# Altium PCB solenoid_driver.PcbDoc
Units mil, origin at the board's own origin, x right, y up, seen from the top; angles counter-clockwise.
Board outline 3937.01 x 3937.01 mil, 2 copper layers (Top Layer, Bottom Layer), stack 62.086 mil thick; 121 components, 72 nets, 390 pads, 147 vias.
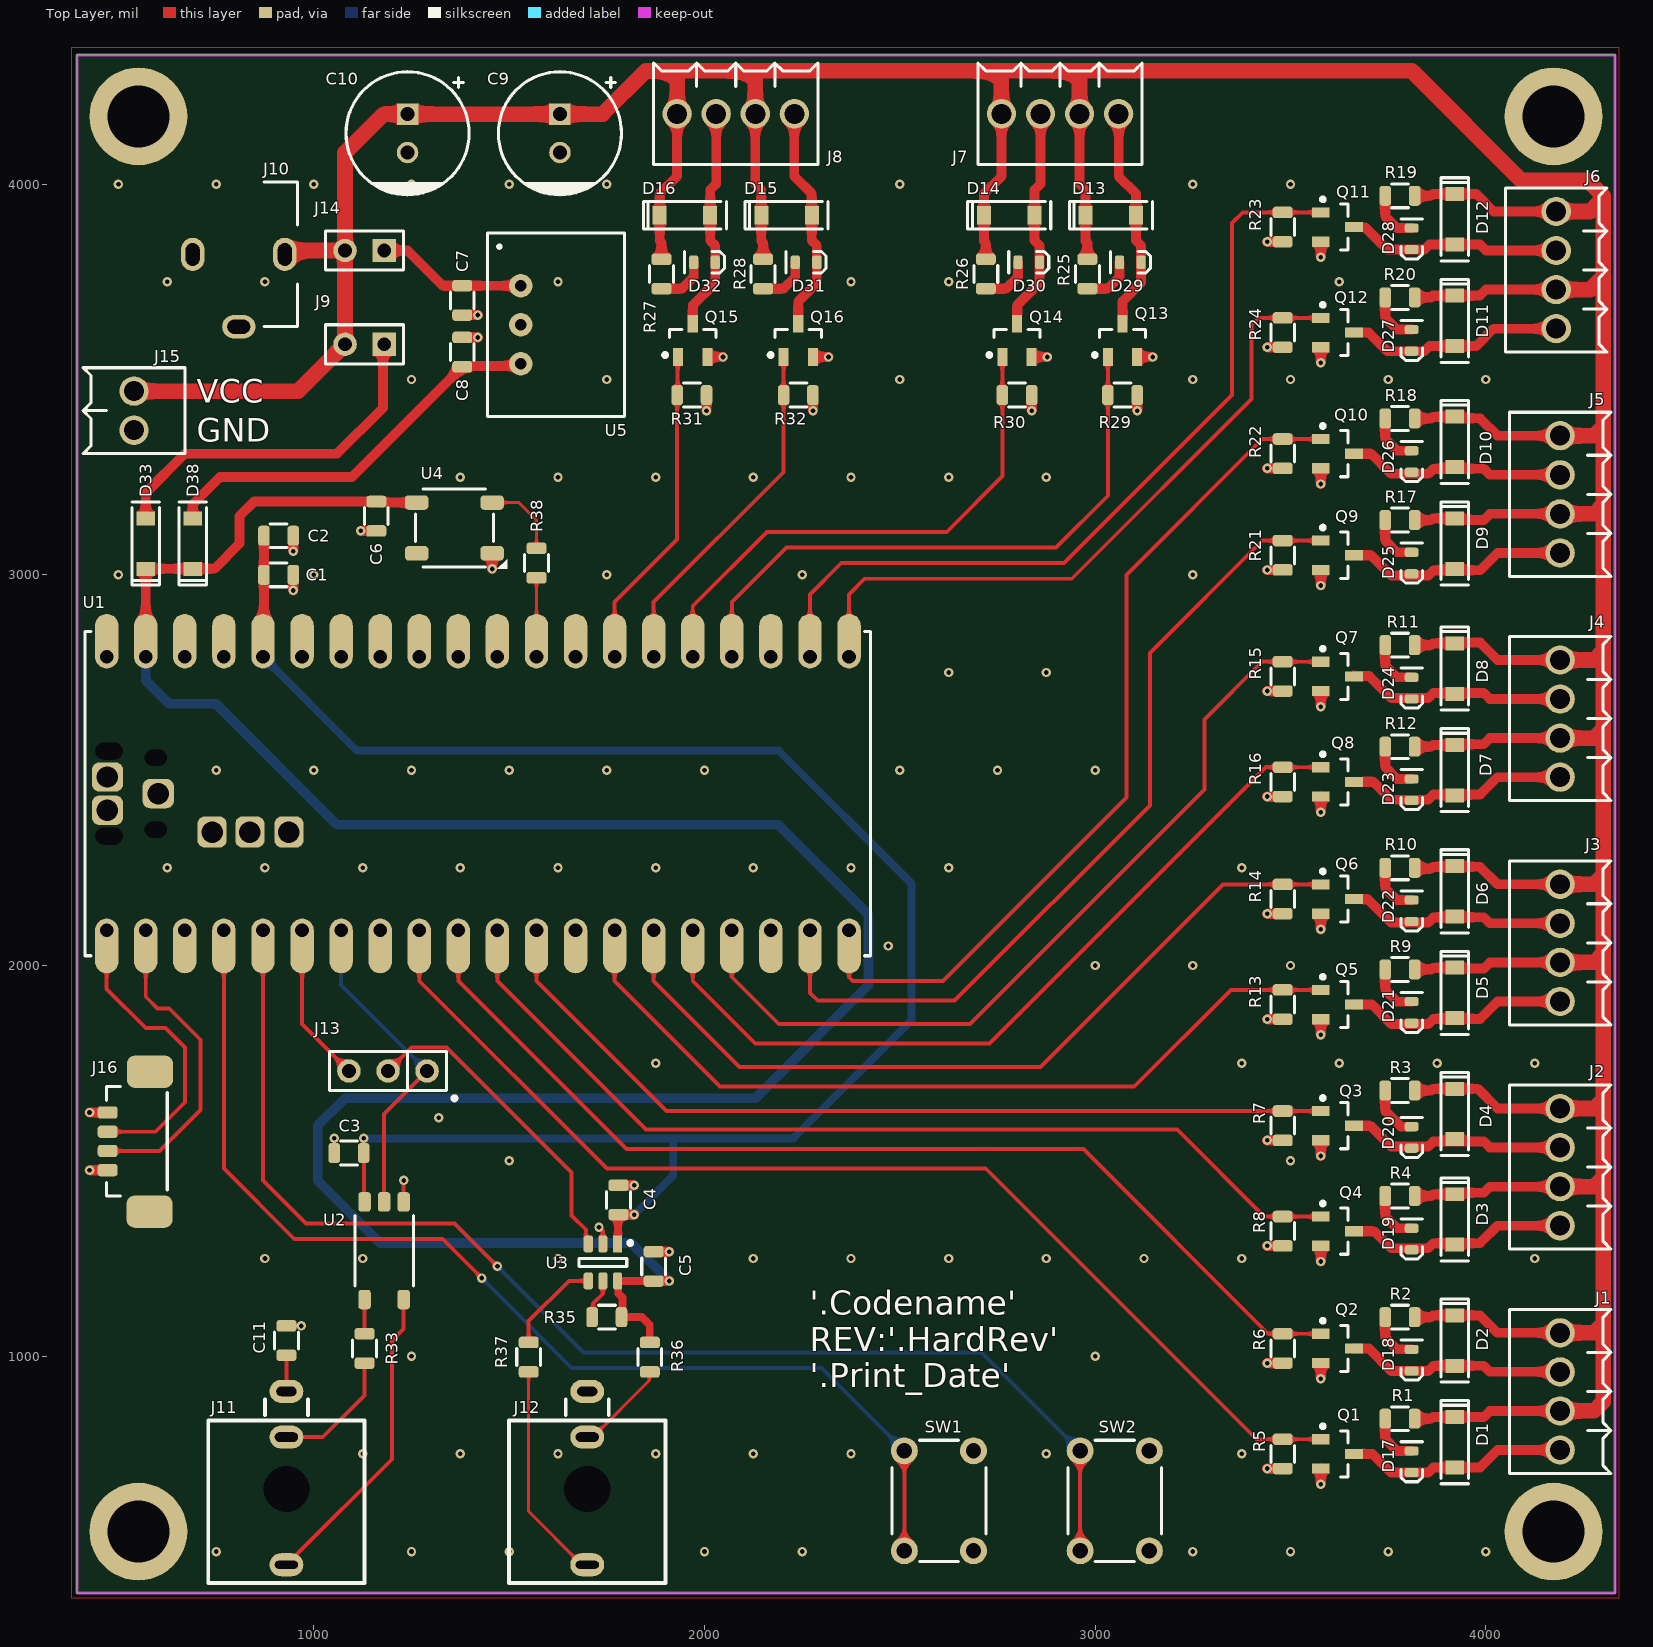
[diagram p0: Top Layer view]
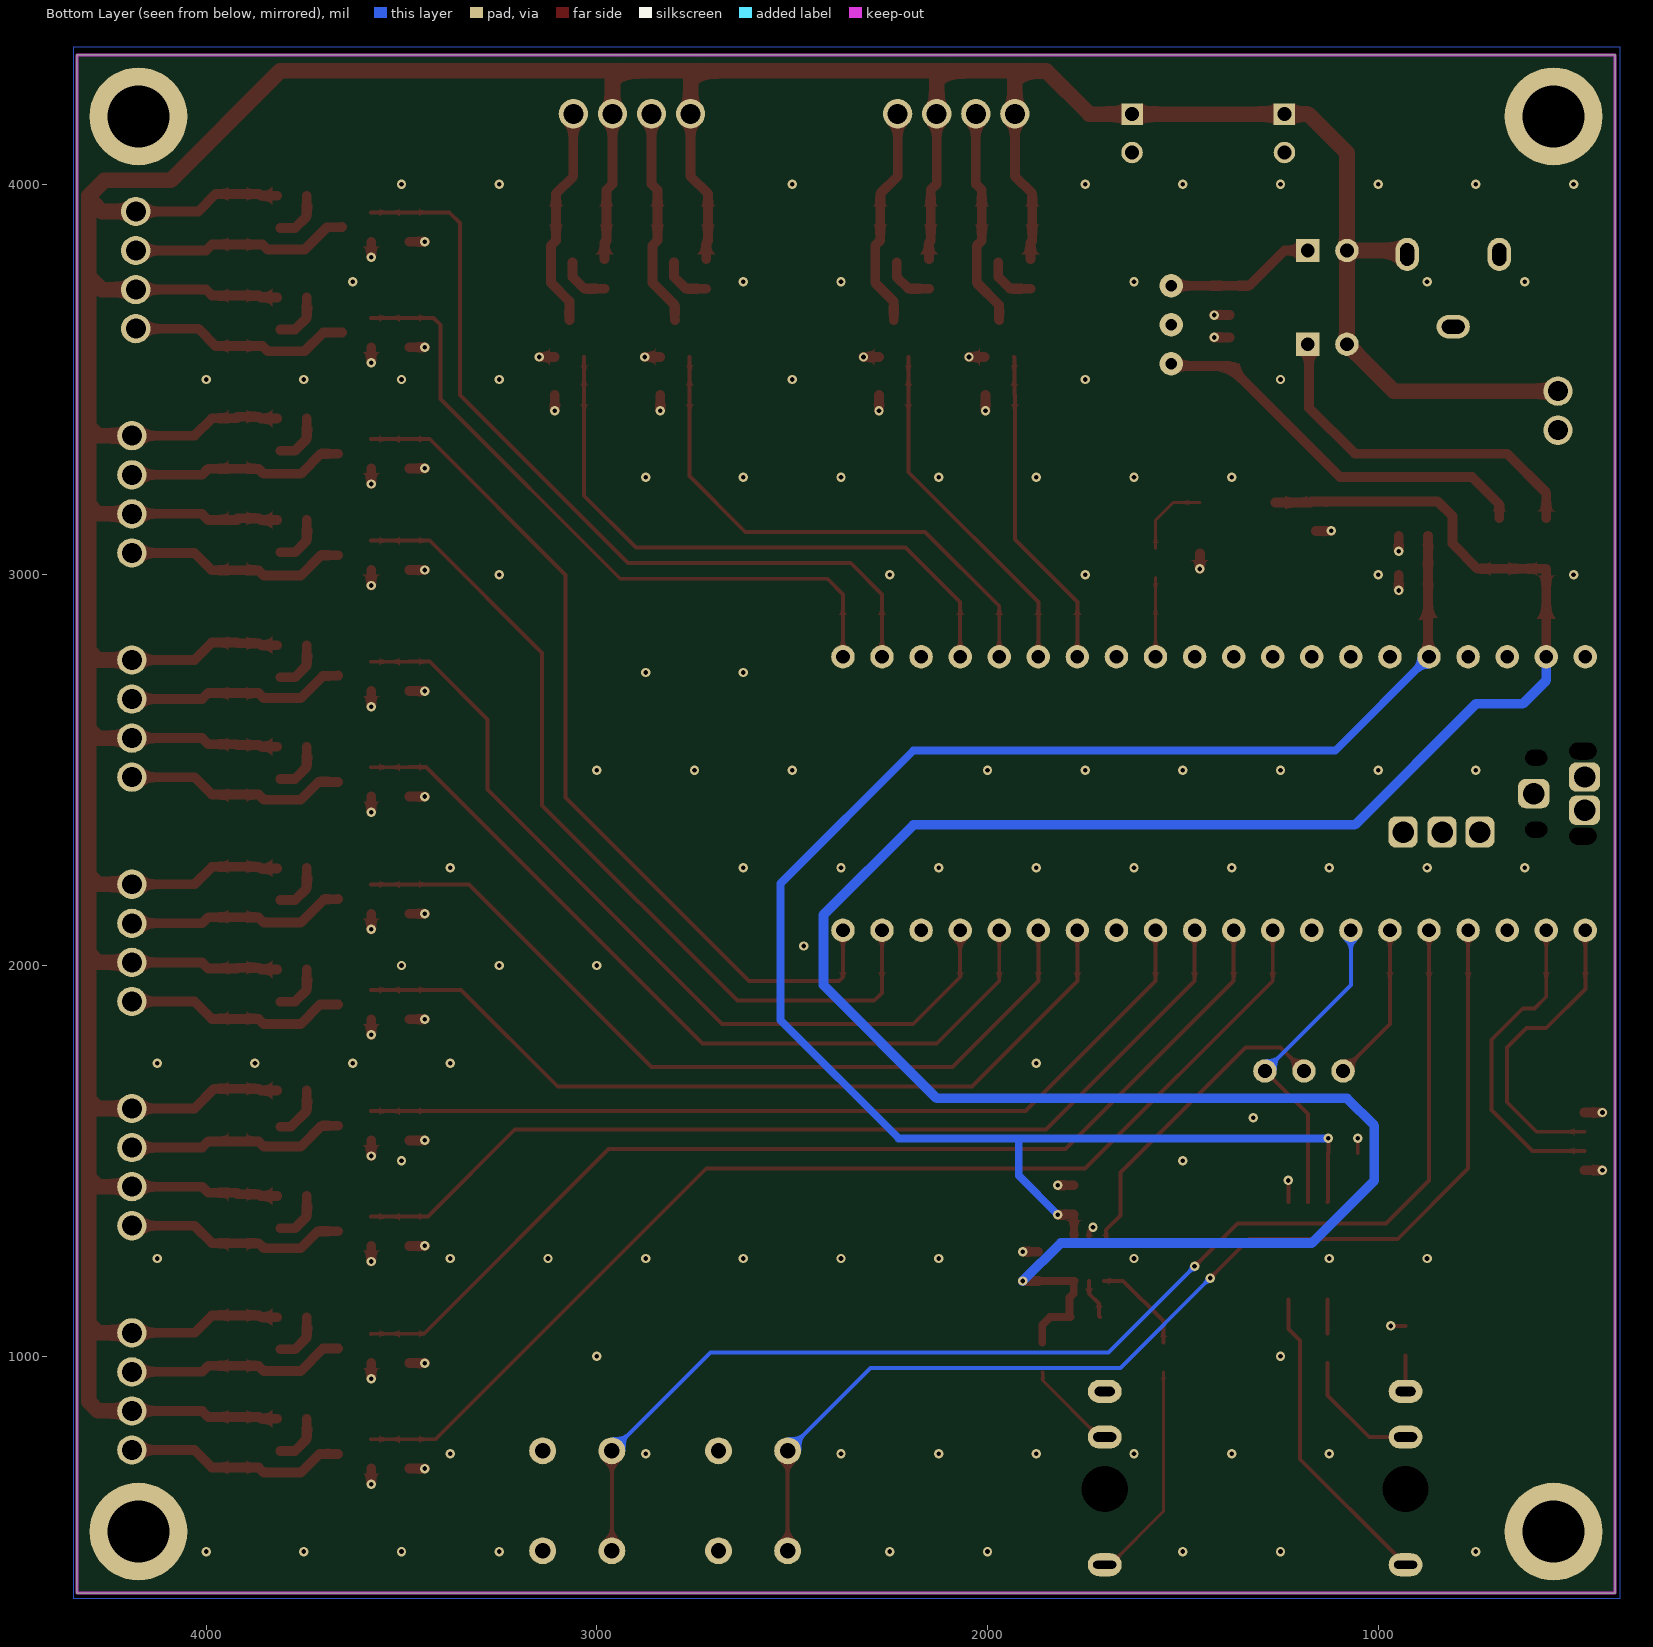
[diagram p1: Bottom Layer view, seen from below]

## Layer stack, top to bottom
Top Solder: solder mask 0.4, Solder Resist, Dk 3.5
Top Layer: signal copper 1.4
Dielectric 1: dielectric 59.2858, FR-4, Dk 4.8
Bottom Layer: signal copper 1.4
Bottom Solder: solder mask 0.4, Solder Resist, Dk 3.5

## Board outline
393.7,393.7 393.7,4330.71 4330.71,4330.71 4330.71,393.7

## Design rules (kind name [scope] priority, off if disabled: settings)
Clearance Clearance_HS [InDifferentialPairClass('DIFF90') vs InPoly] p1: gap=75 ignorepadtopadclearanceinfootprint=FALSE
Clearance Clearance_Poly [All vs InPoly] p2: gap=25 ignorepadtopadclearanceinfootprint=FALSE
Clearance [All] p3: gap=5 ignorepadtopadclearanceinfootprint=FALSE
DiffPairsRouting DIff90 [InDifferentialPairClass('DIFF90')] p1: maxlimit=10 minlimit=7 mostfreqgap=7 toplayer_minwidth=15 toplayer_maxwidth=25 toplayer_prefwidth=25 bottomlayer_minwidth=15 bottomlayer_maxwidth=25 bottomlayer_prefwidth=25 maxuncoupledlength=75
DiffPairsRouting [All] p2: maxlimit=10 minlimit=10 mostfreqgap=10 toplayer_minwidth=15 toplayer_maxwidth=15 toplayer_prefwidth=15 bottomlayer_minwidth=15 bottomlayer_maxwidth=15 bottomlayer_prefwidth=15 maxuncoupledlength=500
Height [All] p1: minheight=0 maxheight=35835.32 prefheight=0
HoleSize [All] p1: absolutevalues=TRUE maxlimit=99999 minlimit=1 maxpercent=80.000 minpercent=20.000
MinimumSolderMaskSliver [All] p1: minsoldermaskwidth=1.8
PolygonConnect [InAnyComponent] p1: thpad.connectstyle=Relief thpad.reliefconductorwidth=10 thpad.reliefentries=4 thpad.polygonreliefangle="90 Angle" thpad.airgapwidth=10 smdpad.connectstyle=Relief smdpad.reliefconductorwidth=10 smdpad.reliefentries=4 smdpad.polygonreliefangle="90 Angle" smdpad.airgapwidth=10 via.connectstyle=Direct via.reliefconductorwidth=10 via.reliefentries=4 via.polygonreliefangle="90 Angle" via.airgapwidth=10
PolygonConnect "Fall through" [All] p2: connectstyle=Direct reliefconductorwidth=10 reliefentries=4 polygonreliefangle="90 Angle" airgapwidth=10
RoutingVias [All] p1: holewidth=28 width=50 viastyle="Through Hole" minholewidth=28 minwidth=50 maxholewidth=28 maxwidth=50
SilkToSilkClearance [All] p1: silktosilkclearance=0
SilkToSolderMaskClearance [IsPad] p1: minsilkscreentomaskgap=0 clearancetoexposedcopper=TRUE
SolderMaskExpansion [All] p1: expansion=2 istentingtop=FALSE
SupplyNets "Schematic Supply Nets_4" [InNet('VSYS')] p1: voltage=0.000
SupplyNets "Schematic Supply Nets_2" [InNet('VIN')] p2: voltage=0.000
SupplyNets "Schematic Supply Nets_1" [InNet('3.3V')] p3: voltage=0.000
SupplyNets "Schematic Supply Nets" [InNet('GND')] p4: voltage=0.000
Width [All] p1: maxlimit=300 minlimit=8 preferedwidth=10
24 further rules are at their usual default settings.

## Components (designator, comment, footprint, x,y, rotation, side; value= is the part's Value field where it differs from the comment)
C1 "0.1µF" Chip0805 910,3000 r180 top
C2 "10µF" Chip0805 910,3100 r180 top
C3 "0.1µF" Chip0805 1090,1520 r0 top
C4 "0.1µF" Chip0805 1780,1400 r270 top
C5 "0.1µF" Chip0805 1870,1230 r270 top
C6 "0.1µF" Chip0805 1160,3150 r90 top
C7 "10µF" Chip0805 1380,3702.4 r90 top
C8 "10µF" Chip0805 1380,3570 r270 top
C9 "68µF" CAP_CAN_TH_3p5mmLS8 1630,4130 r270 top
C10 "68µF" CAP_CAN_TH_3p5mmLS8 1240,4130 r270 top
C11 "0.1µF" Chip0805 930,1040 r270 top
D1 "1N4148W-7-F" SOD-123 3920,780 r270 top
D2 "1N4148W-7-F" SOD-123 3920,1040 r270 top
D3 "1N4148W-7-F" SOD-123 3920,1350 r270 top
D4 "1N4148W-7-F" SOD-123 3920,1620 r270 top
D5 "1N4148W-7-F" SOD-123 3920,1930 r270 top
D6 "1N4148W-7-F" SOD-123 3920,2190 r270 top
D7 "1N4148W-7-F" SOD-123 3920,2500 r270 top
D8 "1N4148W-7-F" SOD-123 3920,2760 r270 top
D9 "1N4148W-7-F" SOD-123 3920,3080 r270 top
D10 "1N4148W-7-F" SOD-123 3920,3340 r270 top
D11 "1N4148W-7-F" SOD-123 3920,3650 r270 top
D12 "1N4148W-7-F" SOD-123 3920,3910 r270 top
D13 "1N4148W-7-F" SOD-123 3040,3920 r0 top
D14 "1N4148W-7-F" SOD-123 2780,3920 r0 top
D15 "1N4148W-7-F" SOD-123 2210,3920 r0 top
D16 "1N4148W-7-F" SOD-123 1950,3920 r0 top
D17 "GREEN" LED0603 3810,730 r270 top
D18 "GREEN" LED0603 3810,990 r270 top
D19 "GREEN" LED0603 3810,1300 r270 top
D20 "GREEN" LED0603 3810,1560 r270 top
D21 "GREEN" LED0603 3810,1880 r270 top
D22 "GREEN" LED0603 3810,2140 r270 top
D23 "GREEN" LED0603 3810,2450 r270 top
D24 "GREEN" LED0603 3810,2710 r270 top
D25 "GREEN" LED0603 3810,3030 r270 top
D26 "GREEN" LED0603 3810,3290 r270 top
D27 "GREEN" LED0603 3810,3600 r270 top
D28 "GREEN" LED0603 3810,3860 r270 top
D29 "GREEN" LED0603 3090,3800 r0 top
D30 "GREEN" LED0603 2830,3800 r0 top
D31 "GREEN" LED0603 2260,3800 r0 top
D32 "GREEN" LED0603 2000,3800 r0 top
D33 "1N4148W-7-F" SOD-123 570,3080 r90 top
D38 "1N4148W-7-F" SOD-123 690,3080 r90 top
J1 "691210910004" WURTH_691210910004 4190,910 r90 top
J2 "691210910004" WURTH_691210910004 4190,1484 r90 top
J3 "691210910004" WURTH_691210910004 4190,2058 r90 top
J4 "691210910004" WURTH_691210910004 4190,2632 r90 top
J5 "691210910004" WURTH_691210910004 4190,3206 r90 top
J6 "691210910004" WURTH_691210910004 4180,3780 r90 top
J7 "691210910004" WURTH_691210910004 2910,4180 r180 top
J8 "691210910004" WURTH_691210910004 2080,4180 r180 top
J9 "3-644456-2" TE_3-644456-2 1130,3590 r180 top
J10 "PJ-102B" CUI_PJ-102B 808,3820 r90 top
J11 "WQP-WQP419GR" PJ366ST 930,660 r180 top
J12 "WQP-WQP419GR" PJ366ST 1700,660 r180 top
J13 "3-644456-3" TE_3-644456-3 1190,1730 r180 top
J14 "3-644456-2" TE_3-644456-2 1130,3830 r180 top
J15 "691210910002" WURTH_691210910002 540,3420 r270 top
J16 "0533980471" Molex_0533980471 540,1550 r270 top
Q1 "AOSS32338C" SOT23-3N 3620,750 r0 top
Q2 "AOSS32338C" SOT23-3N 3620,1020 r0 top
Q3 "AOSS32338C" SOT23-3N 3620,1590 r0 top
Q4 "AOSS32338C" SOT23-3N 3620,1320 r0 top
Q5 "AOSS32338C" SOT23-3N 3620,1900 r0 top
Q6 "AOSS32338C" SOT23-3N 3620,2170 r0 top
Q7 "AOSS32338C" SOT23-3N 3620,2740 r0 top
Q8 "AOSS32338C" SOT23-3N 3620,2470 r0 top
Q9 "AOSS32338C" SOT23-3N 3620,3050 r0 top
Q10 "AOSS32338C" SOT23-3N 3620,3310 r0 top
Q11 "AOSS32338C" SOT23-3N 3620,3890 r0 top
Q12 "AOSS32338C" SOT23-3N 3620,3620 r0 top
Q13 "AOSS32338C" SOT23-3N 3070,3600 r90 top
Q14 "AOSS32338C" SOT23-3N 2800,3600 r90 top
Q15 "AOSS32338C" SOT23-3N 1970,3600 r90 top
Q16 "AOSS32338C" SOT23-3N 2240,3600 r90 top
R1 "10k" Chip0805 3780,840 r180 top
R2 "10k" Chip0805 3780,1100 r180 top
R3 "10k" Chip0805 3780,1680 r180 top
R4 "10k" Chip0805 3780,1410 r180 top
R5 "10k" Chip0805 3480,750 r270 top
R6 "10k" Chip0805 3480,1020 r270 top
R7 "10k" Chip0805 3480,1590 r270 top
R8 "10k" Chip0805 3480,1320 r270 top
R9 "10k" Chip0805 3780,1990 r180 top
R10 "10k" Chip0805 3780,2250 r180 top
R11 "10k" Chip0805 3780,2820 r180 top
R12 "10k" Chip0805 3780,2560 r180 top
R13 "10k" Chip0805 3480,1900 r270 top
R14 "10k" Chip0805 3480,2170 r270 top
R15 "10k" Chip0805 3480,2740 r270 top
R16 "10k" Chip0805 3480,2470 r270 top
R17 "10k" Chip0805 3780,3140 r180 top
R18 "10k" Chip0805 3780,3400 r180 top
R19 "10k" Chip0805 3780,3970 r180 top
R20 "10k" Chip0805 3780,3710 r180 top
R21 "10k" Chip0805 3480,3050 r270 top
R22 "10k" Chip0805 3480,3310 r270 top
R23 "10k" Chip0805 3480,3890 r270 top
R24 "10k" Chip0805 3480,3620 r270 top
R25 "10k" Chip0805 2980,3770 r270 top
R26 "10k" Chip0805 2720,3770 r270 top
R27 "10k" Chip0805 1890,3770 r270 top
R28 "10k" Chip0805 2150,3770 r270 top
R29 "10k" Chip0805 3070,3460 r0 top
R30 "10k" Chip0805 2800,3460 r0 top
R31 "10k" Chip0805 1967.6,3460 r0 top
R32 "10k" Chip0805 2240,3460 r0 top
R33 "220" Chip0805 1130,1020 r90 top
R35 "2.2k" Chip0805 1750,1100 r0 top
R36 "220" Chip0805 1860,997.6 r90 top
R37 "220" Chip0805 1550,997.6 r270 top
R38 "330" Chip0805 1570,3030 r90 top
SW1 "TL1105YF160Q" E-Switch_TL1105YF 2600,630 r270 top
SW2 "TL1105YF160Q" E-Switch_TL1105YF 3050,630 r270 top
U1 "Raspberry Pi Pico" RASPBERRY_PI_PICO 1420,2440 r90 top
U2 "TLP2398(V4-TPL,E" 6-SO_NO_PIN_2 1180,1270 r90 top
U3 "TXU0101DBVR" SOT-23-6N 1740,1240 r270 top
U4 "WS2812B-V5/W" WS2812B 1360,3120 r0 top
U5 "R-78E5.0-0.5" 3-SIP_Module 1530,3640 r270 top

## Footprints (in the part's own frame and the unit in brackets; to place one, negate y for a bottom-side part, rotate by r counter-clockwise, add the part's x,y. Pads: shape width x height; smd on the part's side, far side on the other; paste and mask are expansions set on the pad)
3-SIP_Module [mil]
  round 60 hole 30: 1(-100,0) 2(0,0) 3(100,0)
  silkscreen extent -235,-85 235,265, body extent -228,-78 228,257, height 410
6-SO_NO_PIN_2 [mil]
  rrect50% 50x32 smd: 1(-125,50) 3(-125,-50) 4(125,-50) 5(125,0) 6(125,50)
  silkscreen extent -90,-75 90,75, body extent -138,-73 138,73, height 87
CAP_CAN_TH_3p5mmLS8 [mil]
  rect 55x55 hole 35: 1(-49.21,0)
  round 55 hole 35: 2(49.21,0)
  silkscreen extent -157,-157 157,157
Chip0805 [mm] "Chip Resistor, 2-Leads, Body 2.05x1.25mm, IPC Medium Density"
  rrect50% 0.75x1.3 smd: 1(-0.955,0) 2(0.955,0)
  silkscreen extent -0.55,-0.77 0.55,0.77, body extent -0.95,-0.55 0.95,0.55, height 0.5
CUI_PJ-102B [mil]
  oval 85x60 hole 36 slot 58 at 0 deg: 1(0,-118) 2(0,118)
  oval 60x85 hole 36 slot 58 at 90 deg: 3(-185,0)
  silkscreen extent -185,-150 185,-65, body extent -195,-145 175,422, height 452
E-Switch_TL1105YF [mm]
  round 1.75 hole 1: 1(-3.25,-2.25) 2(3.25,-2.25) 3(-3.25,2.25) 4(3.25,2.25)
  silkscreen extent -3.94,-3.05 3.94,3.05, body extent -3.94,-3 3.94,3, height 16.32
LED0603 [mm] "Chip LED, 2-Leads, Body 1.57x0.85mm, IPC Medium Density"
  rrect50% 0.6x0.9 smd: 1(-0.7,0) 2(0.7,0)
  silkscreen extent -1.3,-0.7 1.3,0.7, body extent -0.82,-0.37 0.83,0.36, height 0.68
Molex_0533980471 [mm]
  rrect50% 2.1x3 smd: 0(-4.525,1.035) 0(4.572,1.016)
  rrect50% 0.8x1.3 smd: 1(-1.875,-1.715) 2(-0.625,-1.714) 3(0.625,-1.714) 4(1.875,-1.714)
  silkscreen extent -3.56,-1.78 3.56,2.16, body extent -5.07,-2.1 5.07,2.1, height 4.71
PJ366ST [mm] "Moddeled after QingPu WQP-WQP419GR"
  round 0.025 hole 3 unplated: 0(0,0)
  oval 2.2x1.5 hole 0.6 slot 1.3 at 0 deg: 1(0,-6.35)
  oval 2.2x1.5 hole 0.6 slot 1.5 at 0 deg: 2(0,-3.38)
  oval 2.2x1.5 hole 0.5 slot 1.5 at 0 deg: 3(0,4.92)
  silkscreen extent -5.08,-5.84 5.08,6.1, body extent -5,-6.73 5,6, height 15.52
RASPBERRY_PI_PICO [mil]
  round 5 hole 43.31 slot 70.87 at 90 deg unplated: 0(-108.9,943.82) 0(108.9,943.82)
  round 5 hole 41.34 slot 57.09 at 90 deg unplated: 0(-92.09,824.53) 0(92.09,824.53)
  oval 140x60 smd: 1(-390,950) 2(-390,850) 3(-390,750) 4(-390,650) 5(-390,550) 6(-390,450) 7(-390,350) 8(-390,250) 9(-390,150) 10(-390,50) 11(-390,-50) 12(-390,-150) 13(-390,-250) 14(-390,-350) 15(-390,-450) 16(-390,-550) 17(-390,-650) 18(-390,-750) 19(-390,-850) 20(-390,-950) 21(390,-950) 22(390,-850) 23(390,-750) 24(390,-650) 25(390,-550) 26(390,-450) 27(390,-350) 28(390,-250) 29(390,-150) 30(390,-50) 31(390,50) 32(390,150) 33(390,250) 34(390,350) 35(390,450) 36(390,550) 37(390,650) 38(390,750) 39(390,850) 40(390,950)
  round 60 hole 35: 1(-350,950) 2(-350,850) 3(-350,750) 4(-350,650) 5(-350,550) 6(-350,450) 7(-350,350) 8(-350,250) 9(-350,150) 10(-350,50) 11(-350,-50) 12(-350,-150) 13(-350,-250) 14(-350,-350) 15(-350,-450) 16(-350,-550) 17(-350,-650) 18(-350,-750) 19(-350,-850) 20(-350,-950) 21(350,-950) 22(350,-850) 23(350,-750) 24(350,-650) 25(350,-550) 26(350,-450) 27(350,-350) 28(350,-250) 29(350,-150) 30(350,-50) 31(350,50) 32(350,150) 33(350,250) 34(350,350) 35(350,450) 36(350,550) 37(350,650) 38(350,750) 39(350,850) 40(350,950)
  rrect50% 75x80 hole 55: TP1(0,818.11) TP2(42.5,948.03) TP3(-42.5,948.03)
  rrect50% 80x75 hole 55: TP4(-98.43,680.32) TP5(-98.43,583.46) TP6(-98.43,483.46)
  silkscreen extent -415,-1005 415,1005, body extent -413,-1005 413,1054, height 147
SOD-123 [mm] "SOD123"
  rect 0.91x1.22 smd: 1(-1.64,0) 2(1.64,0)
  silkscreen extent -2.7,-0.9 2.7,0.9, body extent -1.92,-0.85 1.93,0.85, height 1.43
SOT23-3N [mil] "SOT23, 3-Leads, Body 2.9x1.3mm, Pitch 0.95mm, Lead Span 2.5mm, IPC Medium Density"
  rect 45x26 smd: 1(-42.5,37.4) 2(-42.5,-37.4) 3(42.5,0)
  silkscreen extent -42,-59 28,76, body extent -28,-59 28,59, height 43
SOT-23-6N [mm] "SOT23, 6-Leads, Body 2.90x2.70mm, Pitch 0.95mm, IPC Medium Density"
  rect 1.1x0.6 smd: 1(-1.2,0.95)
  rrect50% 1.1x0.6 smd: 2(-1.2,0) 3(-1.2,-0.95) 4(1.2,-0.95) 5(1.2,0) 6(1.2,0.95)
  silkscreen extent -1.39,-1.55 0.25,1.9, body extent -0.95,-1.55 0.95,1.55, height 1.45
TE_3-644456-2 [mil]
  rect 60x60 hole 35: 1(-50,0)
  round 60 hole 35: 2(50,0)
  silkscreen extent -100,-50 100,50, body extent -94,-46 94,46, height 395
TE_3-644456-3 [mil]
  round 60 hole 35: 1(-100,0) 2(0,0) 3(100,0)
  silkscreen extent -175,-50 150,75, body extent -144,-46 144,46, height 395
WS2812B [mil]
  rrect50% 60x37 smd: 1(-96.46,64.96) 2(-96.46,-64.96) 3(96.46,-64.96) 4(96.46,64.96)
  silkscreen extent -100,-105 135,100, body extent -106,-98 106,98, height 62
WURTH_691210910002 [mm]
  round 1.905 hole 1.3: 1(-1.27,0) 2(1.27,0)
  silkscreen extent -2.79,-3.3 2.79,3.3, body extent -2.74,-3.25 2.74,3.25, height 8.55
WURTH_691210910004 [mm]
  round 1.905 hole 1.3: 1(-3.81,0) 2(-1.27,0) 3(1.27,0) 4(3.81,0)
  silkscreen extent -5.33,-3.3 5.33,3.3, body extent -5.28,-3.25 5.28,3.25, height 8.55

## Part data
C1 C3 C4 C5 C6 C11: library part C2012X7T2E104K125AA, "CAP CER 0.1UF 250V 10% X7T 0805", Manufacturer="TDK Corporation", Operating Temperature="-55°C ~ 125°C", Package / Case="0805 (2012 Metric)", Ratings=-, Supplier Part Number 1=445-7749-1-ND, Temperature Coefficient=X7T, Tolerance=±10%, Voltage=250V, Applications="General Purpose", Capacitance=0.1µF, Features=-, Height - Seated (Max)=-, helpURL=http://product.tdk.com/capacitor/mlcc/en/documents/mlcc_commercial_midvoltage_en.pdf, Lead Spacing=-, Lead Style=-, Manufacturer Part Number=C2012X7T2E104K125AA, Mounting Type="Surface Mount, MLCC", PartNumber=C2012X7T2E104K125AA, Series=C, Size / Dimension="0.079\" L x 0.049\" W (2.00mm x 1.25mm)", Supplier 1=Digi-Key, Supplier 2=Mouser, Thickness (Max)="0.057\" (1.45mm)"
C2 C7 C8: library part C2012X5R1C106K125AC, "CAP CER 10UF 16V 10% X5R 0805", Manufacturer="TDK Corporation", Operating Temperature="-55°C ~ 85°C", Package / Case="0805 (2012 Metric)", Ratings=-, Supplier Part Number 1=445-7646-1-ND, Temperature Coefficient=X5R, Tolerance=±10%, Voltage=16V, Applications="General Purpose", Capacitance=10µF, Features=-, Height - Seated (Max)=-, helpURL=http://product.tdk.com/capacitor/mlcc/en/documents/mlcc_commercial_general_en.pdf, Lead Spacing=-, Lead Style=-, Manufacturer Part Number=C2012X5R1C106K125AC, Mounting Type="Surface Mount, MLCC", PartNumber=C2012X5R1C106K125AC, Series=C, Size / Dimension="0.079\" L x 0.049\" W (2.00mm x 1.25mm)", Supplier 1=Digi-Key, Supplier 2=Mouser, Thickness (Max)="0.057\" (1.45mm)"
C9 C10: library part UPW1J680MPD, "CAP ALUM 68UF 20% 63V RADIAL", ESR (Equivalent Series Resistance)=-, Lifetime @ Temp#="3000 Hrs @ 105°C", Manufacturer=Nichicon, Operating Temperature="-55°C ~ 105°C", Package / Case="Radial, Can", Ripple Current=263.2mA, Supplier Part Number 1=493-1935-ND, Tolerance=±20%, Voltage Rating=63V, Applications="General Purpose", Capacitance=68µF, Height - Seated (Max)="0.453\" (11.50mm)", helpURL=http://nichicon-us.com/english/products/pdfs/e-pw.pdf, Impedance="342 mOhm", Lead Spacing="0.138\" (3.50mm)", Manufacturer Part Number=UPW1J680MPD, Mounting Type="Through Hole", PartNumber=UPW1J680MPD, Series=PW, Size / Dimension="0.315\" Dia (8.00mm)", Supplier 1=Digi-Key, Supplier 2=Mouser, Surface Mount Land Size=-, Type=Polar, Unit Price (USD)=0.48
D1 D2 D3 D4 D5 D6 D7 D8 D9 D10 D11 D12 D13 D14 D15 D16 D33 D38: "DIODE SWITCH 100V 0.15A SOD123", Capacitance @ Vr, F="2pF @ 0V, 1MHz", Current - Average Rectified (Io)=150mA, Current - Reverse Leakage @ Vr="1µA @ 75V", Manufacturer="Diodes Incorporated", Operating Temperature - Junction="-65°C ~ 150°C", Package / Case=SOD-123, Supplier Part Number 1=1N4148W-FDICT-ND, Voltage - DC Reverse (Vr) (Max)=100V, Voltage - Forward (Vf) (Max) @ If="1.25V @ 150mA", Datasheets=http://www.diodes.com/datasheets/ds30086.pdf, Diode Type=Standard, Manufacturer Part Number=1N4148W-7-F, Mounting Type="Surface Mount", PartNumber=1N4148W-7-F, Reverse Recovery Time (trr)=4ns, Series=0, Speed="Small Signal =< 200mA (Io), Any Speed", Supplier 1=Digi-Key, Supplier Device Package=SOD-123
D17 D18 D19 D20 D21 D22 D23 D24 D25 D26 D27 D28 D29 D30 D31 D32: library part LTST-C191GKT, "LED GREEN CLEAR THIN 0603 SMD", Color=Green, Manufacturer="Lite-On Inc", Supplier Part Number 1=160-1443-1-ND, Datasheets=http://optoelectronics.liteon.com/upload/download/DS22-2000-300/S_110_LTST-C191TGKT.pdf, Manufacturer Part Number=LTST-C191GKT, PartNumber=LTST-C191GKT, Supplier 1=Digi-Key, Supplier 2=Mouser, Supplier Part Number 2=859-LTST-C191GKT
J1 J2 J3 J4 J5 J6 J7 J8: "TERM BLOCK 4P HORIZON 2.54MM PCB", Manufacturer="Würth Elektronik", Supplier Part Number 1=732-691210910004-ND, helpURL=https://www.we-online.com/catalog/datasheet/691210910004.pdf, Manufacturer Part Number=691210910004, PartNumber=691210910004, Supplier 1=Digi-Key, Supplier 2=Mouser, Supplier 3=LCSC, Supplier Part Number 2=710-691210910004
J9 J14: "CONN HEADER VERT 2POS .100 TIN", Manufacturer="TE Connectivity", Supplier Part Number 1=A31112-ND, helpURL=http://www.te.com/commerce/DocumentDelivery/DDEController?Action=srchrtrv&DocNm=644456&DocType=Customer+Drawing&DocLang=English, Manufacturer Part Number=3-644456-2, PartNumber=3-644456-2, Supplier 1=Digi-Key, Supplier 2=Mouser, Supplier Part Number 2=571-3-644456-2
J10: "CONN PWR JACK 2.5X5.5MM SOLDER", Manufacturer="CUI Devices", Supplier Part Number 1=CP-102B-ND, helpURL=https://www.cuidevices.com/product/resource/pj-102b.pdf, Manufacturer Part Number=PJ-102B, PartNumber=PJ-102B, Supplier 1=Digi-Key, Supplier 2=Mouser, Supplier Part Number 2=490-PJ-102B
J11 J12: "CONN 3.5mm VIRTICAL STEREO", Manufacturer=QingPu, Connector Type="Phone Jack", Gender=Female, helpURL=http://www.qingpu-electronics.com/en/products/WQP-PJ366ST-364.html, Manufacturer Part Number=WQP-WQP419GR, PartNumber=WQP-WQP419GR, Signal Lines=Stereo, Supplier 1=QingPu, Supplier Part Number 1=WQP-WQP419GR
J13: "CONN HEADER VERT 3POS .100 TIN", Manufacturer="TE Connectivity", Supplier Part Number 1=A31113-ND, helpURL=http://www.te.com/commerce/DocumentDelivery/DDEController?Action=srchrtrv&DocNm=644456&DocType=Customer+Drawing&DocLang=English, Manufacturer Part Number=3-644456-3, PartNumber=3-644456-3, Supplier 1=Digi-Key, Supplier 2=Mouser, Supplier Part Number 2=571-3-644456-3
J15: "TERM BLOCK 2P HORIZON 2.54MM PCB", Manufacturer="Würth Elektronik", Supplier Part Number 1=732-691210910002-ND, helpURL=https://www.we-online.com/catalog/datasheet/691210910002.pdf, Manufacturer Part Number=691210910002, PartNumber=691210910002, Supplier 1=Digi-Key, Supplier 2=Mouser, Supplier 3=LCSC, Supplier Part Number 2=710-691210910002
J16: "CONN HEADER SMD 4POS 1.25MM", Manufacturer=Molex, Supplier Part Number 1=WM7608CT-ND, helpURL=https://www.molex.com/pdm_docs/sd/533980471_sd.pdf, Manufacturer Part Number=0533980471, PartNumber=0533980471, Supplier 1=Digi-Key, Supplier 2=Mouser, Supplier 21=LCSC, Supplier Part Number 2=538-53398-0471, Supplier Part Number 3=C234195
Q1 Q2 Q3 Q4 Q5 Q6 Q7 Q8 Q9 Q10 Q11 Q12 Q13 Q14 Q15 Q16: "MOSFET N-CH 30V 4A SOT23-3", Manufacturer="Alpha & Omega Semiconductor Inc.", Supplier Part Number 1=785-AOSS32338CTR-ND, helpURL=https://aosmd.com/res/data_sheets/AOSS32338C.pdf, Manufacturer Part Number=AOSS32338C, PartNumber=AOSS32338C, Supplier 1=Digi-Key, Supplier 2=Mouser, Supplier 3=LCSC, Supplier Part Number 3=C5587797
R1 R2 R3 R4 R5 R6 R7 R8 R9 R10 R11 R12 R13 R14 R15 R16 R17 R18 R19 R20 R21 R22 R23 R24 R25 R26 R27 R28 R29 R30 R31 R32: library part CRCW080510K0FKEA, "RES 10.0K OHM 1/8W 1% 0805 SMD", Manufacturer="Vishay Dale", Package / Case="0805 (2012 Metric)", Power (Watts)="0.125W, 1/8W", Supplier Part Number 1=541-10.0KCCT-ND, Temperature Coefficient=±100ppm/°C, Tolerance=±1%, Composition="Thick Film", Features="Automotive AEC-Q200 Qualified", Height="0.020\" (0.50mm)", helpURL=http://www.vishay.com/doc?20035, Manufacturer Part Number=CRCW080510K0FKEA, Number of Terminations=2, PartNumber=CRCW080510K0FKEA, Resistance=10k, Series=CRCW, Size / Dimension="0.079\" L x 0.049\" W (2.00mm x 1.25mm)", Supplier 1=Digi-Key, Supplier 2=Mouser, Supplier Device Package="0805 (2012 Metric)"
R33 R36 R37: library part CRCW0805220RFKEA, "RES 220 OHM 1/8W 1% 0805 SMD", Manufacturer="Vishay Dale", Package / Case="0805 (2012 Metric)", Power (Watts)="0.125W, 1/8W", Supplier Part Number 1=541-220CCT-ND, Temperature Coefficient=±100ppm/°C, Tolerance=±1%, Composition="Thick Film", Features="Automotive AEC-Q200 Qualified", Height="0.020\" (0.50mm)", helpURL=http://www.vishay.com/doc?20035, Manufacturer Part Number=CRCW0805220RFKEA, Number of Terminations=2, PartNumber=CRCW0805220RFKEA, Resistance=220, Series=CRCW, Size / Dimension="0.079\" L x 0.049\" W (2.00mm x 1.25mm)", Supplier 1=Digi-Key, Supplier 2=Mouser, Supplier Device Package="0805 (2012 Metric)"
R35: library part CRCW08052K20FKEA, "RES 2.20K OHM 1/8W 1% 0805 SMD", Manufacturer="Vishay Dale", Package / Case="0805 (2012 Metric)", Power (Watts)="0.125W, 1/8W", Supplier Part Number 1=541-2.20KCCT-ND, Temperature Coefficient=±100ppm/°C, Tolerance=±1%, Composition="Thick Film", Features="Automotive AEC-Q200 Qualified", Height="0.020\" (0.50mm)", helpURL=http://www.vishay.com/doc?20035, Manufacturer Part Number=CRCW08052K20FKEA, Number of Terminations=2, PartNumber=CRCW08052K20FKEA, Resistance=2.2k, Series=CRCW, Size / Dimension="0.079\" L x 0.049\" W (2.00mm x 1.25mm)", Supplier 1=Digi-Key, Supplier 2=Mouser, Supplier Device Package="0805 (2012 Metric)"
R38: library part CRCW0805330RFKEA, "RES 330 OHM 1/8W 1% 0805 SMD", Manufacturer="Vishay Dale", Package / Case="0805 (2012 Metric)", Power (Watts)="0.125W, 1/8W", Supplier Part Number 1=541-330CCT-ND, Temperature Coefficient=±100ppm/°C, Tolerance=±1%, Composition="Thick Film", Features="Automotive AEC-Q200 Qualified", Height="0.020\" (0.50mm)", helpURL=http://www.vishay.com/doc?20035, Manufacturer Part Number=CRCW0805330RFKEA, Number of Terminations=2, PartNumber=CRCW0805330RFKEA, Resistance=330, Series=CRCW, Size / Dimension="0.079\" L x 0.049\" W (2.00mm x 1.25mm)", Supplier 1=Digi-Key, Supplier 2=Mouser, Supplier Device Package="0805 (2012 Metric)"
SW1 SW2: "SWITCH TACTILE SPST-NO 0.05A 12V", Manufacturer=E-Switch, Supplier Part Number 1=EG5455-ND, helpURL=https://configured-product-images.s3.amazonaws.com/Datasheets/TL1105.pdf, Manufacturer Part Number=TL1105YF160Q, PartNumber=TL1105YF160Q, Supplier 1=Digi-Key, Supplier 2=Mouser, Supplier 3=LCSC, Supplier Part Number 2=612-TL1105YF160Q, Supplier Part Number 3=C4364602
U1: "RASPBERRY PI PICO RP2040 BOARD", Manufacturer="Raspberry Pi", Manufacturer Part Number=SC0915, Supplier Part Number 1=2648-SC0915CT-ND, PartNumber="Raspberry Pi Pico", Supplier 1=Digi-Key
U2: "High Speed Optocouplers SO6", Manufacturer=Toshiba, helpURL=https://www.mouser.com/datasheet/3/105/1/D2FD834D79FD2648344FBF9B2F5DDBECCF121398C9309D34F7BB98A9BB2CC1D2.pdf, Manufacturer Part Number=TLP2398(V4-TPL,E, PartNumber=TLP2398(V4-TPL,E, Supplier 1=Digi-Key, Supplier 2=Mouser, Supplier 3=LCSC, Supplier Part Number 2=757-TLP2398V4-TPLE, Supplier Part Number 3=C6285465
U3: "IC XLTR VL UNIDIR SOT-23-6", Manufacturer="Texas Instruments", Supplier Part Number 1=296-TXU0101DBVRCT-ND, helpURL=https://www.ti.com/lit/ds/symlink/txu0101.pdf, Manufacturer Part Number=TXU0101DBVR, PartNumber=TXU0101DBVR, Supplier 1=Digi-Key, Supplier 2=Mouser, Supplier 3=LCSC, Supplier Part Number 2=595-TXU0101DBVR, Supplier Part Number 3=C7136368
U4: "Addressable RGB LED", Manufacturer=Worldsemi, Supplier Part Number 1=1568-COM-16347CT-ND, Datasheets=https://www.peace-corp.co.jp/data/WS2812B-V5_V1.0_EN.pdf, Manufacturer Part Number=WS2812B-V5/W, PartNumber=WS2812B-V5/W, Supplier 1=Digi-Key, Supplier 2=Mouser, Supplier 3=LCSC, Supplier Part Number 2=474-COM-24837, Supplier Part Number 3=C2874885
U5: "DC DC CONVERTER 5V 3W", Manufacturer="Recom Power", Supplier Part Number 1=945-1648-5-ND, helpURL=https://recom-power.com/pdf/Innoline/R-78E-0.5.pdf, Manufacturer Part Number=R-78E5.0-0.5, PartNumber=R-78E5.0-0.5, Supplier 1=Digi-Key, Supplier 2=Mouser, Supplier 3=LCSC, Supplier Part Number 2=919-R-78E5.0-0.5, Supplier Part Number 21=C5199916

## Free pads (board coordinates)
  round 250 hole 158: ""(551.18,551.18) ""(551.18,4173.23) ""(4173.23,551.18) ""(4173.23,4173.23)

## Via types
v1: diameter 24, hole 12, Top Layer to Bottom Layer, tented both sides, 147 vias

## Nets (pads, with @x,y where several pads share a name; then routed paths per layer and width w, separated by ;. In a path a pad name is that pad's centre, name@x,y a point inside that pad or via, vN(x,y) a via of type N, cw(c..) or ccw(c..) an arc to the next point about the centre after c; other vN are vias at no path point)
3.3V: C1.2 C2.2 C3.2 C4.2 U1.36 U2.6 U3.1 | length 4605.3
  Top Layer w10: v1(1127.6,1557.6) C3.2 1128.8,1518.8 1128.8,1396.2 U2.6
  Top Layer w20: U3.1 1778.7,1288.54 1778.7,1361.1 C4.2
  Top Layer w25: U1.36@870,2790 872.4,2792.4 C1.2 C2.2 ; C4.2 v1(1820,1362.4)
  Bottom Layer w20: U1.36@870,2790 1110,2550 2190,2550 2530,2210 2530,1860 2227.6,1557.6 1920,1557.6 ; v1(1127.6,1557.6) 1920,1557.6 ; v1(1820,1362.4) 1920,1462.4 1920,1557.6
GND: C1.1 C2.1 C3.1 C4.1 C5.1 C6.1 C7.1 C8.1 C9.2 C10.2 C11.1 J10.2 J10.3 J12.1 J15.2 J16.1 J16.4 pad. Q1.2 Q2.2 Q3.2 Q4.2 Q5.2 Q6.2 Q7.2 Q8.2 Q9.2 Q10.2 Q11.2 Q12.2 Q13.2 Q14.2 Q15.2 Q16.2 R5.2 R6.2 R7.2 R8.2 R13.2 R14.2 R15.2 R16.2 R21.2 R22.2 R23.2 R24.2 R29.2 R30.2 R31.2 R32.2 SW1.3 SW1.4 SW2.3 SW2.4 U1.3 U1.8 U1.13 U1.18 U1.23 U1.28 U1.33 U1.38 U2.4 U3.2 U4.3 U5.2 | length 1871.3
  Top Layer w10: C11.1 v1(967.6,1077.6) ; C3.1 v1(1052.4,1557.6) ; U2.4 v1(1230,1450) ; v1(1730,1330) 1740,1320 U3.2
  Top Layer w25: v1(426.18,1476.18) J16.4 ; v1(426.18,1623.82) J16.1 ; v1(947.6,2960) C1.1 ; v1(947.6,3060) C2.1 ; v1(1120,3112.4) C6.1 ; C8.1 v1(1420,3607.6) ; C7.1 v1(1420,3664.8) ; v1(1456.46,3015.04) U4.3 ; C4.1 v1(1820,1437.6) ; C5.1 v1(1910,1267.6) ; v1(2005.2,3420) R31.2 ; Q15.2 v1(2047.5,3557.5) ; Q16.2 v1(2317.5,3557.5) ; v1(2277.6,3420) R32.2 ; Q14.2 v1(2877.5,3557.5) ; v1(2837.6,3420) R30.2 ; Q13.2 v1(3147.5,3557.5) ; v1(3107.6,3420) R29.2 ; v1(3440,712.4) R5.2 ; v1(3440,982.4) R6.2 ; v1(3440,1282.4) R8.2 ; v1(3440,1552.4) R7.2 ; v1(3440,1862.4) R13.2 ; v1(3440,2132.4) R14.2 ; v1(3440,2432.4) R16.2 ; v1(3440,2702.4) R15.2 ; v1(3440,3012.4) R21.2 ; v1(3440,3272.4) R22.2 ; v1(3440,3582.4) R24.2 ; v1(3440,3852.4) R23.2 ; v1(3577.5,672.5) Q1.2 ; v1(3577.5,942.5) Q2.2 ; v1(3577.5,1242.5) Q4.2 ; v1(3577.5,1512.5) Q3.2 ; v1(3577.5,1822.5) Q5.2 ; v1(3577.5,2092.5) Q6.2 ; v1(3577.5,2392.5) Q8.2 ; v1(3577.5,2662.5) Q7.2 ; v1(3577.5,2972.5) Q9.2 ; v1(3577.5,3232.5) Q10.2 ; v1(3577.5,3542.5) Q12.2 ; v1(3577.5,3812.5) Q11.2
  other v1: 750,500 1250,500 1500,500 2000,500 2250,500 3250,500 3500,500 3750,500 4000,500 1125,750 1375,750 1625,750 1875,750 2125,750 2375,750 2875,750 3375,750 1250,1000 3000,1000 875,1250 1125,1250 1625,1250 2125,1250 2375,1250 2625,1250 2875,1250 3125,1250 3375,1250 4125,1250 1500,1500 3500,1500 1320,1610 1875,1750 3375,1750 3625,1750 3875,1750 4125,1750 3000,2000 3250,2000 3500,2000 2470,2050 625,2250 875,2250 1125,2250 1375,2250 1625,2250 1875,2250 2125,2250 2375,2250 2625,2250 3375,2250 750,2500 1000,2500 1250,2500 1500,2500 1750,2500 2000,2500 2500,2500 2750,2500 3000,2500 2625,2750 2875,2750 500,3000 1000,3000 1750,3000 2250,3000 3250,3000 1375,3250 1625,3250 1875,3250 2125,3250 2375,3250 2625,3250 2875,3250 1250,3500 1750,3500 2500,3500 3250,3500 3500,3500 3750,3500 4000,3500 625,3750 875,3750 1625,3750 2375,3750 2625,3750 3625,3750 500,4000 750,4000 1000,4000 1250,4000 1500,4000 1750,4000 2500,4000 3250,4000 3500,4000
LED_DATA: R38.2 U4.4 | length 204.6
  Top Layer w8: U4.4 1525.04,3184.96 1570,3140 R38.2
MIDI_RX: J13.1 U1.7 U2.5 | length 831.7
  Top Layer w10: U2.5 1180,1620 J13.1
  Bottom Layer w10: U1.7@1070,2090 1070,1950 J13.1
MIDI_TX: J13.3 U1.6 | length 409.7
  Top Layer w10: U1.6@970,2090 970,2050 970,1850 J13.3
NetC7_2: C7.2 J14.1 U5.1 | length 387.3
  Top Layer w25: J14.1 1240,3830 1330,3740 U5.1
NetC8_2: C8.2 D38.2 U5.3 | length 1030.9
  Top Layer w25: D38.2 690,3180 760,3250 1097.6,3250 1366.91,3519.31 1366.91,3530.14 1369.17,3532.4 C8.2 1382.26,3534.67 1524.67,3534.67 U5.3
NetC11_2: C11.2 J11.1 | length 92.4
  Top Layer w10: J11.1 C11.2
NetD17_1: D17.1 R1.2 | length 132.4
  Top Layer w25: R1.2 3742.4,787.6 3772.44,757.56 D17.1
NetD18_1: D18.1 R2.2 | length 132.4
  Top Layer w25: R2.2 3742.4,1047.6 3772.44,1017.56 D18.1
NetD19_1: D19.1 R4.2 | length 132.4
  Top Layer w25: R4.2 3742.4,1357.6 3772.44,1327.56 D19.1
NetD20_1: D20.1 R3.2 | length 136.6
  Top Layer w25: R3.2 3742.4,1627.6 3782.44,1587.56 D20.1
NetD21_1: D21.1 R9.2 | length 132.4
  Top Layer w25: R9.2 3742.4,1937.6 3772.44,1907.56 D21.1
NetD22_1: D22.1 R10.2 | length 132.4
  Top Layer w25: R10.2 3742.4,2197.6 3772.44,2167.56 D22.1
NetD23_1: D23.1 R12.2 | length 132.4
  Top Layer w25: R12.2 3742.4,2507.6 3772.44,2477.56 D23.1
NetD24_1: D24.1 R11.2 | length 132.4
  Top Layer w25: R11.2 3742.4,2767.6 3772.44,2737.56 D24.1
NetD25_1: D25.1 R17.2 | length 132.4
  Top Layer w25: R17.2 3742.4,3087.6 3772.44,3057.56 D25.1
NetD26_1: D26.1 R18.2 | length 132.4
  Top Layer w25: R18.2 3742.4,3347.6 3772.44,3317.56 D26.1
NetD27_1: D27.1 R20.2 | length 132.4
  Top Layer w25: R20.2 3742.4,3657.6 3772.44,3627.56 D27.1
NetD28_1: D28.1 R19.2 | length 132.4
  Top Layer w25: R19.2 3742.4,3917.6 3772.44,3887.56 D28.1
NetD29_1: D29.1 R25.2 | length 132.4
  Top Layer w25: R25.2 3032.4,3732.4 3062.44,3762.44 D29.1
NetD30_1: D30.1 R26.2 | length 132.4
  Top Layer w25: R26.2 2772.4,3732.4 2802.44,3762.44 D30.1
NetD31_1: D31.1 R28.2 | length 132.4
  Top Layer w25: R28.2 2202.4,3732.4 2232.44,3762.44 D31.1
NetD32_1: D32.1 R27.2 | length 132.4
  Top Layer w25: R27.2 1942.4,3732.4 1972.44,3762.44 D32.1
NetD33_2: D33.2 J9.1 | length 926.6
  Top Layer w25: D33.2 570,3210 670,3310 1060,3310 1177.14,3427.14 1177.14,3587.14 J9.1
NetJ11_2: J11.2 R33.1 | length 326.7
  Top Layer w10: J11.2 1023.07,793.07 1130,900 R33.1
NetJ11_3: J11.3 U2.3 | length 803.3
  Top Layer w10: J11.3 930.51,466.3 953.17,488.96 953.17,489.46 1200,736.3 1200,1040 1230,1070 U2.3
NetJ12_2: J12.2 R36.1 | length 241.3
  Top Layer w8: J12.2 1713.78,793.07 1858.63,937.92 1858.63,958.63 R36.1
NetJ12_3: J12.3 R37.2 | length 563.9
  Top Layer w8: R37.2 1550,602.52 1686.22,466.3 J12.3
NetJ13_2: J13.2 U3.3 | length 827.8
  Top Layer w10: J13.2 1250,1790 1340,1790 1660,1470 1660,1360 1696.35,1323.65 1696.35,1293.5 U3.3
NetR33_2: R33.2 U2.1 | length 87.4
  Top Layer w10: R33.2 U2.1
NetR35_1: R35.1 U3.5 | length 104.2
  Top Layer w10: R35.1 1714.73,1102.33 1714.73,1134.73 1740,1160 U3.5
NetR37_1: R37.1 U3.4 | length 250
  Top Layer w10: R37.1 1550,1090 1652.76,1192.76 U3.4
NetR38_1: R38.1 U1.29 | length 202.4
  Top Layer w8: U1.29@1570,2790 1570,2830 R38.1
OUT0: Q1.1 R5.1 U1.9 | length 2923.2
  Top Layer w10: U1.9@1270,2090 1270,2050 1270,1960 1750,1480 2720,1480 3412.4,787.6 R5.1 3480.1,787.5 3577.4,787.5 Q1.1
OUT1: Q2.1 R6.1 U1.10 | length 2711.4
  Top Layer w10: U1.10@1370,2090 1370,2050 1370,1960 1800,1530 2970,1530 3442.4,1057.6 R6.1 3480.1,1057.5 3577.4,1057.5 Q2.1
OUT2: Q4.1 R8.1 U1.11 | length 2487.1
  Top Layer w10: U1.11@1470,2090 1470,2050 1470,1960 1850,1580 3210,1580 3432.4,1357.6 R8.1 3480.1,1357.5 3577.4,1357.5 Q4.1
OUT3: Q3.1 R7.1 U1.12 | length 2275.3
  Top Layer w10: U1.12@1570,2090 1570,2050 1570,1960 1902.4,1627.6 R7.1 3480.1,1627.5 3577.4,1627.5 Q3.1
OUT4: Q5.1 R13.1 U1.14 | length 2152
  Top Layer w10: U1.14@1770,2090 1770,2050 1770,1960 2040,1690 3100,1690 3347.6,1937.6 R13.1 3480.1,1937.5 3577.4,1937.5 Q5.1
OUT5: Q6.1 R14.1 U1.15 | length 2122.4
  Top Layer w10: U1.15@1870,2090 1870,2050 1870,1960 2090,1740 2860,1740 3327.6,2207.6 R14.1 3480.1,2207.5 3577.4,2207.5 Q6.1
OUT6: Q8.1 R16.1 U1.16 | length 2097
  Top Layer w10: U1.16@1970,2090 1970,2050 1970,1960 2130,1800 2730,1800 3437.6,2507.6 R16.1 3480.1,2507.5 3577.4,2507.5 Q8.1
OUT7: Q7.1 R15.1 U1.17 | length 2167
  Top Layer w10: U1.17@2070,2090 2070,1970 2190,1850 2680,1850 3280,2450 3280,2630 3427.6,2777.6 R15.1 3480.1,2777.5 3577.4,2777.5 Q7.1
OUT8: Q9.1 R21.1 U1.19 | length 2192.1
  Top Layer w10: U1.19@2270,2090 2270,2050 2270,1930 2290,1910 2640,1910 3140,2410 3140,2800 3427.6,3087.6 R21.1 3480.1,3087.5 3577.4,3087.5 Q9.1
OUT9: Q10.1 R22.1 U1.20 | length 2240.4
  Top Layer w10: U1.20@2370,2090 2370,2050 2370,1970 2380,1960 2610,1960 3080,2430 3080,3000 3427.6,3347.6 R22.1 3480.1,3347.5 3577.4,3347.5 Q10.1
OUT10: Q12.1 R24.1 U1.21 | length 1772
  Top Layer w10: U1.21@2370,2790 2370,2830 2370,2950 2410,2990 2940,2990 3400,3450 3400,3640 3417.6,3657.6 R24.1 3480.1,3657.5 3577.4,3657.5 Q12.1
OUT11: Q11.1 R23.1 U1.22 | length 2130.3
  Top Layer w10: U1.22@2270,2790 2270,2830 2270,2950 2350,3030 2920,3030 3350,3460 3350,3900 3377.6,3927.6 R23.1 3480.1,3927.5 3577.4,3927.5 Q11.1
OUT12: Q13.1 R29.1 U1.24 | length 1570.4
  Top Layer w10: U1.24@2070,2790 2070,2830 2070,2930 2210,3070 2900,3070 3032.4,3202.4 R29.1 3032.5,3460.1 3032.5,3557.4 Q13.1
OUT13: Q14.1 R30.1 U1.25 | length 1365.3
  Top Layer w10: U1.25@1970,2790 1970,2830 1970,2920 2160,3110 2620,3110 2762.4,3252.4 R30.1 2762.5,3460.1 2762.5,3557.4 Q14.1
OUT14: Q16.1 R32.1 U1.26 | length 905.3
  Top Layer w10: U1.26@1870,2790 1870,2830 1870,2930 2202.4,3262.4 R32.1 2202.5,3460.1 2202.5,3557.4 Q16.1
OUT15: Q15.1 R31.1 U1.27 | length 834.9
  Top Layer w10: U1.27@1770,2790 1770,2830 1770,2930 1930,3090 R31.1 1931.3,3461.3 1931.3,3556.2 Q15.1
S_OUT0: D1.2 D17.2 J1.1 Q1.3 | length 571
  Top Layer w25: Q1.3 3710,750 3757.56,702.44 3852.44,702.44 3865.43,715.43 3985.43,715.43 4030,760 J1.1
S_OUT1: D2.2 D18.2 J1.3 Q2.3 | length 628.5
  Top Layer w25: Q2.3 3663,1019.5 3700.5,1019.5 3757.56,962.44 D18.2 3852.44,962.44 3865.43,975.43 D2.2 ; 3985.43,975.43 D2.2 ; J1.3 4010,960 3994.57,975.43 D2.2
S_OUT2: D3.2 D19.2 J2.1 Q4.3 | length 569.4
  Top Layer w25: Q4.3 3714,1320 3757.56,1276.44 3810,1276.44 3852.44,1276.44 3865.43,1289.43 3985.43,1289.43 4030,1334 J2.1
S_OUT3: D4.2 D20.2 J2.3 Q3.3 | length 626.9
  Top Layer w25: Q3.3 3704,1590 3757.56,1536.44 3852.44,1536.44 3865.43,1549.43 D4.2@3920,1549.43 ; 3985.43,1549.43 D4.2@3920,1549.43 ; J2.3 4010,1534 3994.57,1549.43 D4.2@3920,1549.43
S_OUT4: D5.2 D21.2 J3.1 Q5.3 | length 571.9
  Top Layer w25: Q5.3 3708,1900 3757.56,1850.44 3810,1850.44 3852.44,1850.44 3865.43,1863.43 3985.43,1863.43 4030,1908 J3.1
S_OUT5: D6.2 D22.2 J3.3 Q6.3 | length 629.4
  Top Layer w25: Q6.3 3663,2169.5 3698.5,2169.5 3757.56,2110.44 3852.44,2110.44 3865.43,2123.43 D6.2@3920,2123.43 ; 3985.43,2123.43 D6.2@3920,2123.43 ; J3.3 4010,2108 3994.57,2123.43 D6.2@3920,2123.43
S_OUT6: D7.2 D23.2 J4.1 Q8.3 | length 570.2
  Top Layer w25: Q8.3 3712,2470 3757.56,2424.44 3810,2424.44 3852.44,2424.44 3865.43,2437.43 3985.43,2437.43 4030,2482 J4.1
S_OUT7: D8.2 D24.2 J4.3 Q7.3 | length 563.1
  Top Layer w25: Q7.3@3662.5,2742 3663,2741.5 3700.5,2741.5 3757.56,2684.44 3852.44,2684.44 3865.43,2697.43 3920,2697.43 3985.43,2697.43 3994.57,2697.43 4010,2682 J4.3
S_OUT8: D9.2 D25.2 J5.1 Q9.3 | length 572.7
  Top Layer w25: Q9.3 3706,3050 3757.56,2998.44 3810,2998.44 3852.44,2998.44 3865.43,3011.43 3985.43,3011.43 4030,3056 J5.1
S_OUT9: D10.2 D26.2 J5.3 Q10.3 | length 626.1
  Top Layer w25: Q10.3 3706,3310 3757.56,3258.44 3810,3258.44 3852.44,3258.44 3865.43,3271.43 D10.2@3920,3271.43 ; 3985.43,3271.43 D10.2@3920,3271.43 ; J5.3 4010,3256 3994.57,3271.43 D10.2@3920,3271.43
S_OUT10: D11.2 D27.2 J6.1 Q12.3 | length 571
  Top Layer w25: Q12.3@3652.5,3620 3700,3620 3747.56,3572.44 3842.44,3572.44 3855.43,3585.43 3975.43,3585.43 4020,3630 J6.1
S_OUT11: D12.2 D28.2 J6.3 Q11.3 | length 628.5
  Top Layer w25: Q11.3@3652.5,3890 3653,3889.5 3690.5,3889.5 3747.56,3832.44 3800,3832.44 3842.44,3832.44 3855.43,3845.43 D12.2@3910,3845.43 ; 3975.43,3845.43 D12.2@3910,3845.43 ; J6.3 4000,3830 3984.57,3845.43 D12.2@3910,3845.43
S_OUT12: D13.2 D29.2 J7.1 Q13.3 | length 571
  Top Layer w25: J7.1 3060,4020 3104.57,3975.43 3104.57,3855.43 3117.56,3842.44 3117.56,3747.56 3070,3700 Q13.3@3070,3652.5
S_OUT13: D14.2 D30.2 J7.3 Q14.3 | length 628.5
  Top Layer w25: Q14.3@2800,3652.5 2800.5,3653 2800.5,3690.5 2857.56,3747.56 D30.2 2857.56,3842.44 2844.57,3855.43 D14.2@2844.57,3910 ; 2844.57,3975.43 D14.2@2844.57,3910 ; J7.3 2860,4000 2844.57,3984.57 D14.2@2844.57,3910
S_OUT14: D15.2 D31.2 J8.1 Q16.3 | length 571
  Top Layer w25: J8.1 2230,4020 2274.57,3975.43 2274.57,3855.43 2287.56,3842.44 2287.56,3747.56 2240,3700 Q16.3@2240,3652.5
S_OUT15: D16.2 D32.2 J8.3 Q15.3 | length 628.5
  Top Layer w25: Q15.3@1970,3652.5 1970.5,3653 1970.5,3690.5 2027.56,3747.56 D32.2 2027.56,3842.44 2014.57,3855.43 D16.2@2014.57,3910 ; 2014.57,3975.43 D16.2@2014.57,3910 ; J8.3 2030,4000 2014.57,3984.57 D16.2@2014.57,3910
SW1: SW1.1 SW1.2 U1.4 | length 2906.4
  Top Layer w10: U1.4@770,2090 770,2050 770,1480 950,1300 1330,1300 v1(1430,1200) ; SW1.2 SW1.1
  Bottom Layer w10: v1(1430,1200) 1660,970 2299.37,970 SW1.1
SW2: SW2.1 SW2.2 U1.5 | length 3274
  Top Layer w10: U1.5@870,2090 870,2050 870,1450 980,1340 1360,1340 v1(1470,1230) ; SW2.2 SW2.1
  Bottom Layer w10: v1(1470,1230) 1690,1010 2709.37,1010 SW2.1
UART0_RX: J16.3 U1.2 | length 816.4
  Top Layer w10: J16.3 605.39,1525.39 710,1630 710,1810 630,1890 600,1890 570,1920 570,2050 U1.2@570,2090
UART0_TX: J16.2 U1.1 | length 780.9
  Top Layer w10: U1.1@470,2090 470,2050 470,1940 570,1840 620,1840 670,1790 670,1650 594.61,1574.61 J16.2
VIN: C9.1 C10.1 D1.1 D2.1 D3.1 D4.1 D5.1 D6.1 D7.1 D8.1 D9.1 D10.1 D11.1 D12.1 D13.1 D14.1 D15.1 D16.1 J1.2 J1.4 J2.2 J2.4 J3.2 J3.4 J4.2 J4.4 J5.2 J5.4 J6.2 J6.4 J7.2 J7.4 J8.2 J8.4 J9.2 J10.1 J14.2 J15.1 R1.1 R2.1 R3.1 R4.1 R9.1 R10.1 R11.1 R12.1 R17.1 R18.1 R19.1 R20.1 R25.1 R26.1 R27.1 R28.1 | length 15849.7
  Top Layer w25: R27.1 1890,3850 1885.43,3854.57 1885.43,3975.43 1930,4020 J8.4 ; J8.2 2130,4000 2145.43,3984.57 2145.43,3854.57 2150,3850 R28.1 ; R26.1 2720,3850 2715.43,3854.57 2715.43,3975.43 2760,4020 J7.4 ; J7.2 2960,4000 2975.43,3984.57 2975.43,3854.57 2980,3850 R25.1 ; R1.1 3860,840 3864.57,844.57 D1.1 3994.57,844.57 4010,860 J1.2 ; R2.1 3860,1100 3864.57,1104.57 D2.1 3985.43,1104.57 4030,1060 J1.4 ; R4.1 3860,1410 3864.57,1414.57 D3.1 ; R3.1 3860,1680 3864.57,1684.57 3979.43,1684.57 4030,1634 J2.4 ; R9.1 3860,1990 3864.57,1994.57 D5.1 ; R10.1@3817.6,2248 3860,2248 3864.57,2252.57 3985.43,2252.57 4030,2208 J3.4 ; R12.1 3860,2560 3864.57,2564.57 D7.1 ; R11.1 3860,2820 3864.57,2824.57 D8.1 ; R17.1 3860,3140 3864.57,3144.57 D9.1 ; R18.1 3860,3400 3864.57,3404.57 D10.1 ; R20.1 3860,3710 3864.57,3714.57 D11.1 3984.57,3714.57 4000,3730 J6.2 ; R19.1 3860,3970 3864.57,3974.57 D12.1 3975.43,3974.57 4020,3930 J6.4 ; D3.1@3920,1418.57 3994.57,1418.57 4010,1434 J2.2 ; D5.1@3920,1992.57 3994.57,1992.57 4010,2008 J3.2 ; D7.1@3920,2566.57 3994.57,2566.57 4010,2582 J4.2 ; D8.1@3920,2826.57 3985.43,2826.57 4030,2782 J4.4 ; D9.1@3920,3140.57 3994.57,3140.57 4010,3156 J5.2 ; D10.1@3920,3400.57 3985.43,3400.57 4030,3356 J5.4
  Top Layer w40: J15.1 960,3470 J9.2 J14.2 ; J10.1 926,3820.76 935.24,3830 J14.2 ; 1906.57,4290 1930,4266.57 J8.4 ; 2106.57,4290 2130,4266.57 J8.2 ; 2736.57,4290 2760,4266.57 J7.4 ; 2936.57,4290 2960,4266.57 J7.2 ; J6.2 4266.57,3730 4290,3753.43 ; J6.4 4266.57,3930 4290,3953.43 ; J1.2 4276.57,860 4300,883.43 4300,1083.43 ; J1.4 4276.57,1060 4300,1083.43 ; J2.2 4276.57,1434 4300,1457.43 ; J2.4 4276.57,1634 4300,1657.43 ; J3.2 4276.57,2008 4300,2031.43 ; J3.4 4276.57,2208 4300,2231.43 ; J4.2 4276.57,2582 4300,2605.43 ; J4.4 4276.57,2782 4300,2805.43 ; J5.2 4276.57,3156 4300,3179.43 ; J5.4 4276.57,3356 4300,3379.43 ; J14.2 1080,4080 1179.21,4179.21 C10.1 C9.1 1739.21,4179.21 1850,4290 3810,4290 4090,4010 4260,4010 4300,3970 4300,3379.43 ; 4300,1083.43 4300,1457.43 ; 4300,1457.43 4300,1657.43 ; 4300,1657.43 4300,2031.43 ; 4300,2031.43 4300,2231.43 ; 4300,2231.43 4300,2605.43 ; 4300,2605.43 4300,2805.43 ; 4300,2805.43 4300,3179.43 ; 4300,3179.43 4300,3379.43
VSYS: C5.2 C6.2 D33.1 D38.1 R35.2 R36.2 U1.39 U3.6 U4.1 | length 6433.7
  Top Layer w20: U3.6 U3.6@1777.58,1192.58 ; R36.2 1860,1080 1849.97,1090.03 1840,1100 R35.2 1790,1102.4 1790,1150 1779.21,1160.79 1779.21,1190.94 U3.6@1777.58,1192.58 ; C5.2@1869.82,1192.58 U3.6@1777.58,1192.58
  Top Layer w25: U1.39@570,2790 570,2830 D33.1 D38.1 745.43,3015.43 810,3080 810,3150 847.6,3187.6 C6.2 1170.83,3187.6 1173.46,3184.96 U4.1 ; C5.2@1869.82,1192.58 C5.2 v1(1910,1192.4)
  Bottom Layer w25: U1.39@570,2790 570,2730 630,2670 750,2670 1060,2360 2190,2360 2420,2130 2420,1950 2130,1660 1080,1660 1010,1590 1010,1450 1170,1290 1812.4,1290 v1(1910,1192.4)
pads on no net: J11.0 J12.0 J16.0 U1.0 U1.30 U1.31 U1.32 U1.34 U1.35 U1.37 U1.40 U1.TP1 U1.TP2 U1.TP3 U1.TP4 U1.TP5 U1.TP6 U4.2

## Polygon pours and split planes (outlines as drawn)
GND on Bottom Layer "NONET_L02_P000" (solid, remove dead copper, shelved, pour order 0): 380,4350 4340,4350 4340,380 380,380
GND on Top Layer "NONET_L01_P001" (solid, remove dead copper, shelved, pour order 1): 380,4350 4340,4350 4340,380 380,380

## Keep-outs
Keep-Out Layer:
  the board outline again, w7.87

## Silkscreen, mask and mechanical layers (free items; w line width, h text height)
Top Overlay:
  text "VCC" at 700,3440 h60
  text "GND" at 700,3340 h60
  text "'.Codename' / REV:'.HardRev' / '.Print_Date'" at 2270,920 h62
Top Solder:
  text "é" at 2090,453 h650
Bottom Solder:
  text "é" at 2211.4,453 h650
Mechanical 1:
  the board outline again, w7.87